# Altium PCB PCB2.PcbDoc
Units mm, origin at the board's own origin, x right, y up, seen from the top; angles counter-clockwise.
Board outline 72.7 x 45.24 mm, 2 copper layers (Top Layer, Bottom Layer), stack 1.571 mm thick; 20 components, 54 nets, 92 pads, 2 vias.
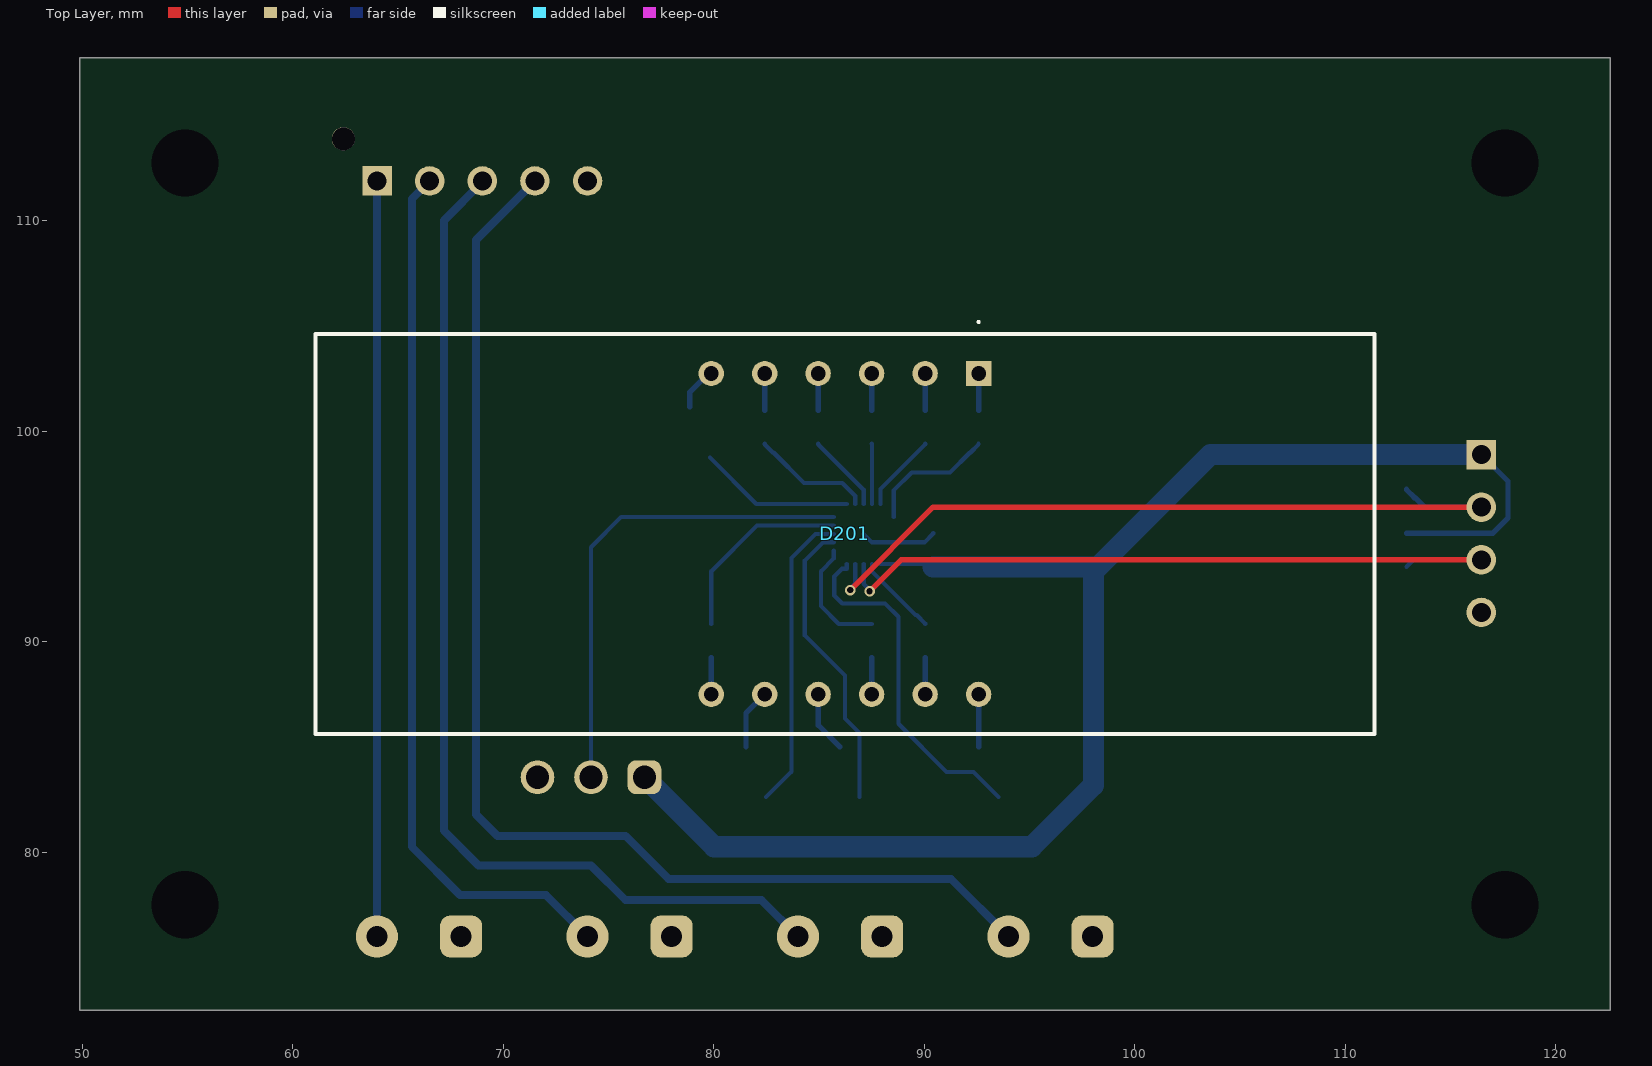
[diagram p0: Top Layer view]
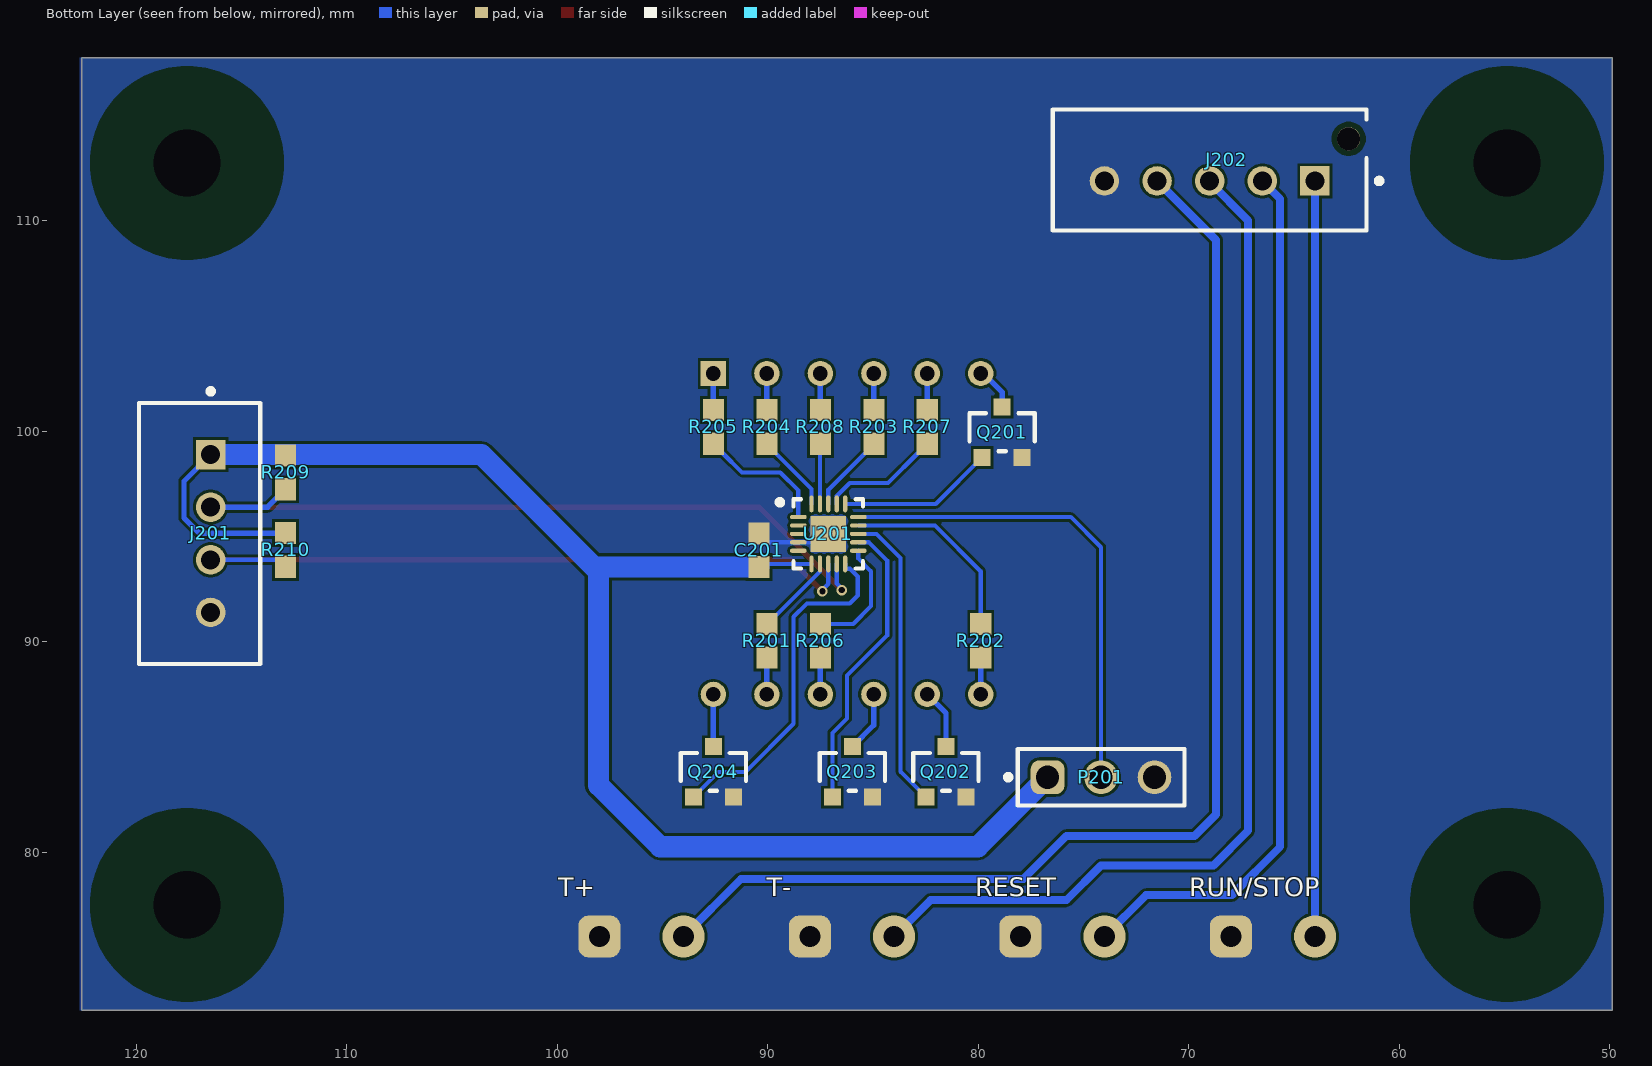
[diagram p1: Bottom Layer view, seen from below]
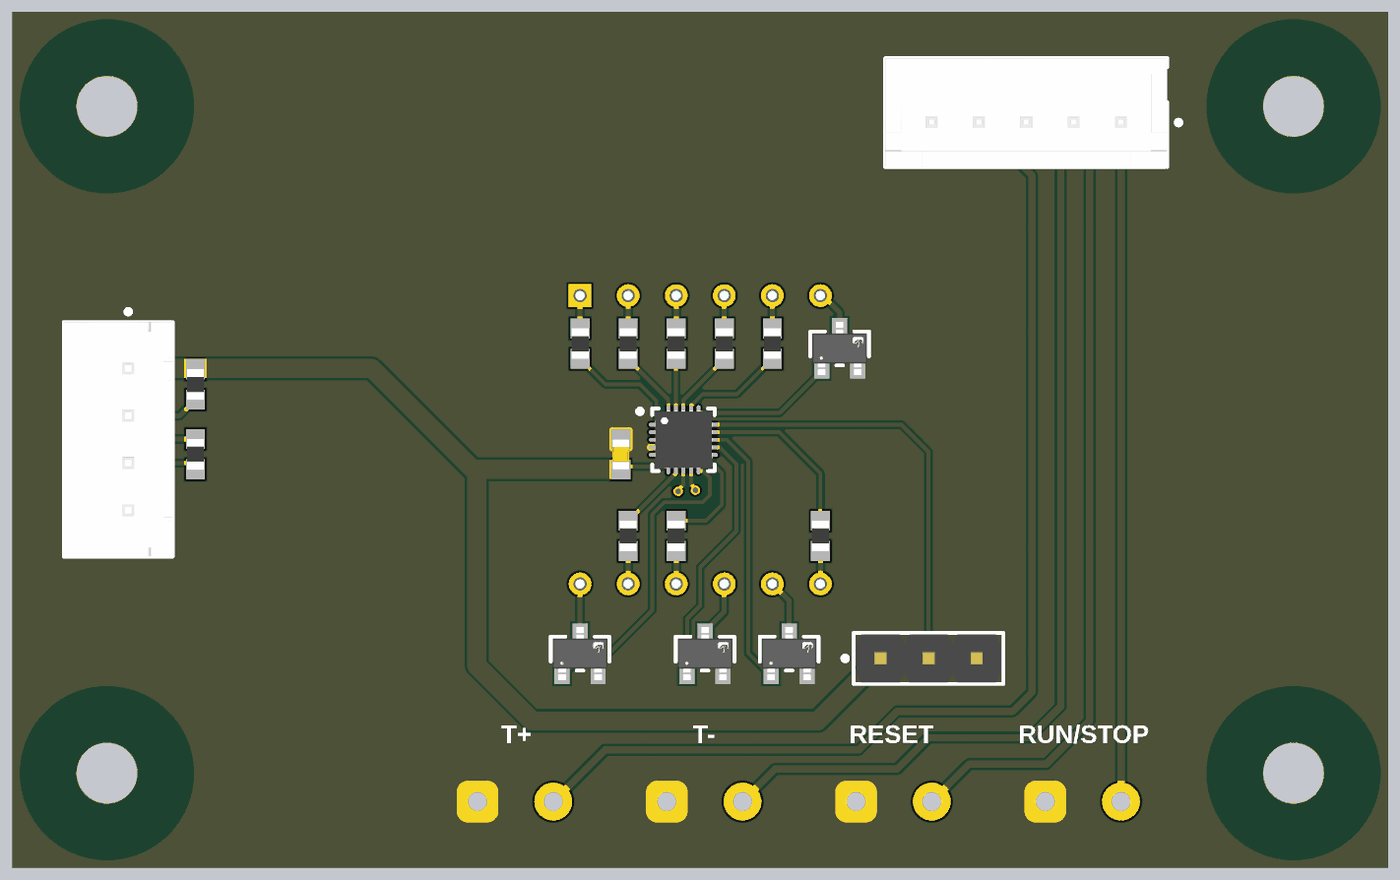
[diagram p2: 3D render of the assembled board from below, using the file's embedded part models]

## Layer stack, top to bottom
Top Solder: solder mask 0.0102, Solder Resist, Dk 3.5
Top Layer: signal copper 0.0356
Dielectric 1: dielectric 1.5, FR-4, Dk 4.8
Bottom Layer: signal copper 0.0356
Bottom Solder: solder mask 0.0102, Solder Resist, Dk 3.5

## Board outline
49.883,72.503 122.583,72.503 122.583,117.743 49.883,117.743

## Design rules (kind name [scope] priority, off if disabled: settings)
Clearance Clearance_MountingHole [All vs InUnion(2)] p1: gap=3 ignorepadtopadclearanceinfootprint=TRUE
Clearance [All] p2: gap=0.127 ignorepadtopadclearanceinfootprint=TRUE except(0.254: Arc-Hole Track-Hole SMDPad-Hole THPad-THPad THPad-Hole Via-Via Via-Hole Fill-Hole Poly-Hole Region-Hole Text-Hole)
PolygonConnect [All] p1: connectstyle=Direct reliefconductorwidth=0.254 reliefentries=4 polygonreliefangle="90 Angle" airgapwidth=0.254
RoutingVias [All] p1: holewidth=0.3 width=0.5 viastyle="Through Hole" minholewidth=0.3 minwidth=0.5 maxholewidth=2539.975 maxwidth=2539.975
SolderMaskExpansion SolderMaskExpansion_VIA [IsVia] p1: expansion=-100 istentingtop=FALSE
SolderMaskExpansion [All] p2: expansion=0.102 istentingtop=FALSE
SupplyNets "Schematic Supply Nets_4" [InNet('L')] p1: voltage=0.000
SupplyNets "Schematic Supply Nets_3" [InNet('N')] p2: voltage=0.000
SupplyNets "Schematic Supply Nets_2" [InNet('GND')] p3: voltage=0.000
SupplyNets "Schematic Supply Nets_1" [InNet('L_SW')] p4: voltage=0.000
SupplyNets "Schematic Supply Nets" [InNet('3V3')] p5: voltage=0.000
Width [All] p1: maxlimit=254 minlimit=0.127 preferedwidth=0.2
30 further rules are at their usual default settings.

## Components (designator, comment, footprint, x,y, rotation, side; value= is the part's Value field where it differs from the comment)
C201 "Capacitor" CAPC1608X09N 90.424,94.348 r270 bottom value=1p
D201 "F-5461AS" 5461AS 92.583,102.743 r180 top locked
J201 "B4B-XH-A(LF)(SN)" FP-B4B-XH-A_LF_SN-MFG 116.984,95.143 r90 bottom
J202 "B5B-XH-AM(LF)(SN)" FP-B5B-XH-AM_LF_SN-MFG 69.008,112.412 r180 bottom
P201 "61300311121" 61300311121 74.168,83.566 r180 bottom
Q201 "AO3400A" FP-SOT23-MFG 78.867,99.949 r90 bottom
Q202 "AO3400A" FP-SOT23-MFG 81.534,83.82 r90 bottom
Q203 "AO3400A" FP-SOT23-MFG 85.979,83.82 r90 bottom
Q204 "AO3400A" FP-SOT23-MFG 92.583,83.82 r90 bottom
R201 "Resistor" RESC1608X06N 90.043,90.043 r270 bottom
R202 "Resistor" RESC1608X06N 79.883,90.043 r270 bottom
R203 "Resistor" RESC1608X06N 84.963,100.203 r90 bottom
R204 "Resistor" RESC1608X06N 90.043,100.203 r90 bottom
R205 "Resistor" RESC1608X06N 92.583,100.203 r90 bottom
R206 "Resistor" RESC1608X06N 87.503,90.043 r270 bottom
R207 "Resistor" RESC1608X06N 82.423,100.203 r90 bottom
R208 "Resistor" RESC1608X06N 87.503,100.203 r90 bottom
R209 "Resistor" RESC1608X06N 112.903,98.044 r90 bottom
R210 "Resistor" RESC1608X06N 112.903,94.361 r90 bottom
U201 "CH32V003" QFN40P300X300X75_HS-21N 87.122,95.123 r180 bottom

## Footprints (in the part's own frame and the unit in brackets; to place one, negate y for a bottom-side part, rotate by r counter-clockwise, add the part's x,y. Pads: shape width x height; smd on the part's side, far side on the other; paste and mask are expansions set on the pad)
5461AS [mm]
  rect 1.2x1.2 hole 0.7: 1(0,0)
  round 1.2 hole 0.7: 2(2.54,0) 3(5.08,0) 4(7.62,0) 5(10.16,0) 6(12.7,0) 7(12.7,15.24) 8(10.16,15.24) 9(7.62,15.24) 10(5.08,15.24) 11(2.54,15.24) 12(0,15.24)
  silkscreen extent -18.8,-2.5 31.5,17.12, body extent -18.8,-1.88 31.5,17.12, height 8.35
61300311121 [mm] "Pin Header, pitch 2.54 mm, THT, Vertical, single row, 3p"
  rrect50% 1.6x1.6 hole 1.1: 1(-2.54,0)
  round 1.6 hole 1.1: 2(0,0) 3(2.54,0)
  silkscreen extent -4.53,-1.35 3.96,1.35, body extent -3.81,-1.27 3.81,1.27, height 8.57
CAPC1608X09N [mm] "Chip Capacitor, 2-Leads, Body 1,55x0,85mm, IPC Medium Density"
  rect 1.05x1 smd: 1(-0.8,0) 2(0.8,0)
  body extent -0.8,-0.45 0.8,0.45, height 0.9
FP-B4B-XH-A_LF_SN-MFG [mm]
  rect 1.4x1.4 hole 0.9 paste-2539.97 mask+0: 1(3.75,-0.525)
  round 1.4 hole 0.9 paste-2539.97 mask+0: 2(1.25,-0.525) 3(-1.25,-0.525) 4(-3.75,-0.525)
  silkscreen extent -6.2,-2.88 6.87,2.88, body extent -6.2,-2.88 6.2,2.88, height 7
FP-B5B-XH-AM_LF_SN-MFG [mm]
  rect 1.4x1.4 hole 0.9 paste-2539.97 mask+0: 1(5,-0.525)
  round 1.4 hole 0.9 paste-2539.97 mask+0: 2(2.5,-0.525) 3(0,-0.525) 4(-2.5,-0.525) 5(-5,-0.525)
  round 1.1 hole 1.1 unplated paste-2539.97 mask+0: ""(6.6,1.475)
  silkscreen extent -7.45,-2.88 8.17,2.88, body extent -7.45,-2.88 7.45,2.88, height 7
FP-SOT23-MFG [mm]
  rect 0.8x0.8 smd paste+0 mask+0: 1(-1.2,0.95) 2(-1.2,-0.95) 3(1.2,0)
  silkscreen extent -0.9,-1.55 0.9,1.55, body extent -1.41,-1.45 1.41,1.45, height 1.25
QFN40P300X300X75_HS-21N [mm] "QFN, 20-Leads, Body 3,00x3,00mm, Pitch 0,40mm, Thermal Pad 1,70x1,70mm, IPC Medium Density"
  rect 1.7x1.7 smd: 0(0,0)
  oval 0.8x0.2 smd: 1(-1.425,0.8) 2(-1.425,0.4) 3(-1.425,0) 4(-1.425,-0.4) 5(-1.425,-0.8) 11(1.425,-0.8) 12(1.425,-0.4) 13(1.425,0) 14(1.425,0.4) 15(1.425,0.8)
  oval 0.2x0.8 smd: 6(-0.8,-1.425) 7(-0.4,-1.425) 8(0,-1.425) 9(0.4,-1.425) 10(0.8,-1.425) 16(0.8,1.425) 17(0.4,1.425) 18(0,1.425) 19(-0.4,1.425) 20(-0.8,1.425)
  silkscreen extent -2.43,-1.65 1.65,1.65, body extent -1.53,-1.53 1.53,1.53, height 0.75
RESC1608X06N [mm] "Chip Resistor, 2-Leads, Body 1,55x0,85mm, IPC Medium Density"
  rect 1.05x1 smd: 1(-0.8,0) 2(0.8,0)
  body extent -0.8,-0.45 0.8,0.45, height 0.6

## Part data
C201: library part C0603
D201: library part 5461AS, "Quad LED 7-Segment Display", Manufacturer_Name=ARK, Datasheet Link=https://4donline.ihs.com/images/VipMasterIC/IC/ZOTD/ZOTDS00015/ZOTDS00015-1.pdf?hkey=EF798316E3902B6ED9A73243A3159BB0, Geometry.Height=8.25mm, Manufacturer_Part_Number=F-5461AS
J201: library part CMP-17439-000250-1, "CONN HEADER VERT 4POS 2.5MM", Color=Natural, Contact Resistance=20mR, Current Rating=3A, Flammability Rating="UL94 V-0", Housing Color=White, Insulation Resistance=1GR, Max Operating Temperature=85°C, Max Voltage Rating (AC)=250V, Min Operating Temperature=-25°C, Package Quantity=500, Connector Type=Header, Contact Finish - Mating=TIN, Contact Material=Brass, Contact Plating=Tin, Contact Shape=Square, Contact Type="Male Pin", Depth=5.75mm, Fastening Type=Detent, Gender=Male, Housing Material=Polyamide, Insulation Color=Natural, Insulation Material=Nylon, Lead Free="Lead Free", Lead Pitch=2.5mm, Length=12.4mm, Mated Stacking Heights=9.8mm, Material=Polyamide, Max Current Rating=3A, Max Voltage Rating (DC)=250V, Mount="Through Hole", Number Of Contacts=4, Number of Positions=4, Number of Rows=1, Orientation=Straight, Packaging=Bulk, Pitch=2.5mm, REACH SVHC="No SVHC", Series=XH, Termination=Solder, Voltage Rating=250V, Voltage Rating (AC)=250V, Wire/Cable Gauge=22AWG
J202: library part CMP-17439-000304-1, "CONN HEADER VERT 5POS 2.5MM", Color=Green, Contact Resistance=20mR, Flammability Rating="UL94 V-0", Housing Color=White, Insulation Color=Natural, Max Current Rating=3A, Max Operating Temperature=85°C, Max Voltage Rating (AC)=250V, Min Operating Temperature=-25°C, Connector Type=Header, Contact Finish - Mating=TIN, Contact Material=Brass, Contact Plating=Copper, Contact Shape=Square, Contact Type="Male Pin", Depth=5.75mm, Fastening Type=Detent, Housing Material=Polyamide, Insulation Material=Nylon, Lead Free="Lead Free", Length=14.9mm, Mated Stacking Heights=9.8mm, Mount="Through Hole", Number of Positions=5, Number of Rows=1, Orientation=Straight, Packaging=Bulk, Pitch=2.5mm, Series=XH, Termination=Solder, Voltage Rating=250V
P201: library part CMP-1502-01062-3, Color=Black, Contact Resistance=20mΩ, Current Rating=3A, Max Operating Temperature=105°C, Min Operating Temperature=-40°C, Operating Supply Voltage=250V, Connector Type="Male Pin", Contact Material=Copper, Contact Mating Length=5.9944mm, Contact Plating=Gold, Gender=Male, Height=8.94mm, Lead Free="Lead Free", Lead Pitch=2.54mm, Mount="Through Hole", NexarPartId=32855521, Number Of Contacts=3, Number of Pins=3, Number of Positions=3, Number of Rows=1, Orientation=Vertical, Packaging=Bulk, Pitch=2.54mm, REACH SVHC=Unknown, RoHS=Compliant, Termination=Solder, Voltage Rating=250V
Q201 Q202 Q203 Q204: library part CMP-83955-000006-1, "MOSFET N-CH 30V 5.7A SOT23", Case/Package=SOT-23, Continuous Drain Current (ID)=5.7A, Drain to Source Voltage (Vdss)=30V, Gate to Source Voltage (Vgs)=12V, Input Capacitance=630pF, Max Operating Temperature=150°C, Max Power Dissipation=1.4W, Min Operating Temperature=-55°C, Lead Free="Lead Free", Mount="Surface Mount", Number of Elements=1, Number of Pins=3, Packaging="Tape and Reel", Power Dissipation=1.4W, Radiation Hardening=No, Rds On Max=26.5mR
R201 R202 R203 R204 R205 R206 R207 R208 R209 R210: library part R0603
U201: library part CH32V003F4U6, "CH32V003 series is an industrial-grade general-purpose microcontroller designed based on QingKe RISC-V2A / core, which supports 48MHz system main frequency in the product function"

## Free pads (board coordinates)
  round 0 hole 3.2: 2(117.583,77.503) 3(54.883,77.503) 4(117.583,112.743) 5(54.883,112.743)
  round 2 hole 1: 6(64,76) 8(74,76) 10(84,76) 12(94,76)
  rrect50% 2x2 hole 1: 7(68,76) 9(78,76) 11(88,76) 13(98,76)

## Via types
v1: diameter 0.5, hole 0.3, Top Layer to Bottom Layer, 2 vias

## Nets (pads, with @x,y where several pads share a name; then routed paths per layer and width w, separated by ;. In a path a pad name is that pad's centre, name@x,y a point inside that pad or via, vN(x,y) a via of type N, cw(c..) or ccw(c..) an arc to the next point about the centre after c; other vN are vias at no path point)
3V3: C201.2 J201.1 P201.1 R209.2 R210.2 U201.6 | length 73.8
  Bottom Layer w0.2: U201.6 C201.2@90.287,93.698
  Bottom Layer w0.254: C201.2@90.287,93.698 C201.2@90.424,93.561 ; 98.044,93.345 98.26,93.561 ; R210.2 117.005,95.161 117.729,95.885 117.729,97.623 J201.1
  Bottom Layer w1: P201.1 80.01,80.264 95.123,80.264 98.044,83.185 98.044,93.345 ; C201.2@90.424,93.561 98.26,93.561 103.592,98.893 J201.1
A: R201.1 U201.7 | length 3.9
  Bottom Layer w0.2: U201.7 87.522,93.336 89.59,91.268 89.643,91.268 90.043,90.868 R201.1
B: R202.1 U201.14 | length 9.2
  Bottom Layer w0.2: R202.1 79.883,93.345 82.061,95.523 U201.14
C: R203.1 U201.18 | length 3.7
  Bottom Layer w0.2: R203.1 84.963,99.378 87.122,97.219 U201.18
D: R204.1 U201.20 | length 3.7
  Bottom Layer w0.2: U201.20 87.922,97.257 90.043,99.378 R204.1
DIG1: D201.6 Q201.3 | length 2.1
  Bottom Layer w0.254: Q201.3 78.867,101.854 79.756,102.743 D201.6
DIG2: D201.8 Q202.3 | length 2.9
  Bottom Layer w0.254: Q202.3 81.534,86.614 D201.8
DIG3: D201.9 Q203.3 | length 2.9
  Bottom Layer w0.254: D201.9 84.963,86.036 Q203.3
DIG4: D201.12 Q204.3 | length 2.5
  Bottom Layer w0.254: Q204.3 D201.12
DP: R208.1 U201.19 | length 2.9
  Bottom Layer w0.2: R208.1 87.522,99.384 U201.19
E: R205.1 U201.1 | length 6.2
  Bottom Layer w0.2: U201.1 88.547,97.183 89.408,98.044 91.224,98.044 92.158,98.978 92.183,98.978 92.583,99.378 R205.1
F: R206.1 U201.11 | length 5.6
  Bottom Layer w0.2: U201.11 85.697,93.952 85.09,93.345 85.09,91.694 85.941,90.843 R206.1
G: R207.1 U201.17 | length 5.7
  Bottom Layer w0.2: R207.1 82.423,99.378 82.823,98.978 82.848,98.978 84.29,97.536 86.106,97.536 86.722,96.92 U201.17
G_DIG1: Q201.1 U201.16 | length 7.4
  Bottom Layer w0.2: Q201.1 82.018,96.548 U201.16
G_DIG2: Q202.1 U201.13 | length 14.3
  Bottom Layer w0.2: Q202.1 83.693,83.829 83.693,93.98 84.836,95.123 U201.13
G_DIG3: Q203.1 U201.12 | length 14
  Bottom Layer w0.2: U201.12 85.198,94.723 84.328,93.853 84.328,90.297 86.233,88.392 86.233,86.36 86.929,85.664 Q203.1
G_DIG4: Q204.1 U201.10 | length 16.6
  Bottom Layer w0.2: U201.10 86.322,93.465 86.089,93.465 85.725,93.101 85.725,92.202 86.106,91.821 88.138,91.821 88.773,91.186 88.773,86.106 91.059,83.82 92.333,83.82 Q204.1
GND: C201.1 J201.4 J202.5 P201.3 pad.7 pad.9 pad.11 pad.13 Q201.2 Q202.2 Q203.2 Q204.2 U201.0 U201.4 | length 3.7
  Bottom Layer w0.2: U201.0 87.522,94.723 U201.4 90.011,94.723 90.424,95.136 C201.1@90.424,95.161
L: 
L_SW: 
N: 
NetB101_1: 
NetB101_4: 
NetB101_6: 
NetB103_1: 
NetB103_2: 
NetB103_3: 
NetB103_4: 
NetC101_2: 
NetD201_1: D201.1 R205.2 | length 1.7
  Bottom Layer w0.254: R205.2 D201.1
NetD201_2: D201.2 R204.2 | length 1.7
  Bottom Layer w0.254: R204.2 D201.2
NetD201_3: D201.3 R208.2 | length 1.7
  Bottom Layer w0.254: R208.2 D201.3
NetD201_4: D201.4 R203.2 | length 1.7
  Bottom Layer w0.254: R203.2 D201.4
NetD201_5: D201.5 R207.2 | length 1.7
  Bottom Layer w0.254: R207.2 D201.5
NetD201_7: D201.7 R202.2 | length 1.7
  Bottom Layer w0.254: D201.7 R202.2
NetD201_10: D201.10 R206.2 | length 1.7
  Bottom Layer w0.254: D201.10 R206.2
NetD201_11: D201.11 R201.2 | length 1.7
  Bottom Layer w0.254: D201.11 R201.2
NetF102_1: 
NetJ102_2: J201.2 R209.1 U201.9 | length 36.9
  Top Layer w0.254: v1(86.487,92.456) 90.424,96.393 J201.2
  Bottom Layer w0.2: v1(86.487,92.456) 86.487,92.537 86.722,92.772 U201.9
  Bottom Layer w0.254: R209.1 112.903,97.219 113.276,96.846 113.301,96.846 113.754,96.393 J201.2
NetJ102_3: J201.3 R210.1 U201.8 | length 34.8
  Top Layer w0.254: v1(87.399,92.394) 88.898,93.893 J201.3
  Bottom Layer w0.2: U201.8 87.122,92.753 87.399,92.476 v1(87.399,92.394) ; R210.1 113.235,93.893 J201.3
NetL101_2: 
NetL101_3: 
NetP101_2: 
NetP201_2: P201.2 U201.15 | length 23
  Bottom Layer w0.2: P201.2 74.168,94.488 75.603,95.923 U201.15
Reset: 
Reset_DB: J202.2 pad.8 | length 42.1
  Bottom Layer w0.381: J202.2 65.659,111.038 65.659,80.264 67.945,77.978 72.022,77.978 pad.8
Run/Stop: 
Run/Stop_DB: J202.1 pad.6 | length 36
  Bottom Layer w0.381: pad.6 64,111.585 J202.1@64.302,111.887
SIG_IN: 
T+: 
T+_DB: J202.4 pad.12 | length 58.9
  Bottom Layer w0.381: J202.4 68.707,109.086 68.707,81.788 69.723,80.772 75.819,80.772 77.851,78.74 91.26,78.74 pad.12
T-: 
T-_DB: J202.3 pad.10 | length 50.5
  Bottom Layer w0.381: J202.3 69.008,111.836 67.183,110.011 67.183,81.026 68.834,79.375 74.168,79.375 75.819,77.724 82.276,77.724 pad.10
ZC: 
pads on no net: J202. U201.2 U201.3 U201.5

## Polygon pours and split planes (outlines as drawn)
GND on Bottom Layer "GND_L02_P000" (solid, pour order 0): 49.883,117.743 122.682,117.743 122.682,84.328 122.682,72.503 49.883,72.503

## Silkscreen, mask and mechanical layers (free items; w line width, h text height)
Bottom Overlay:
  text "RUN/STOP" at 69.977,77.596 h1.52
  text "RESET" at 80.137,77.596 h1.52
  text "T-" at 90.043,77.596 h1.52
  text "T+" at 99.949,77.596 h1.52
Mechanical 1:
  the board outline again, w0.254